# EAGLE board PCB Board Assembly - Eagle (EAGLE 9.6.2)
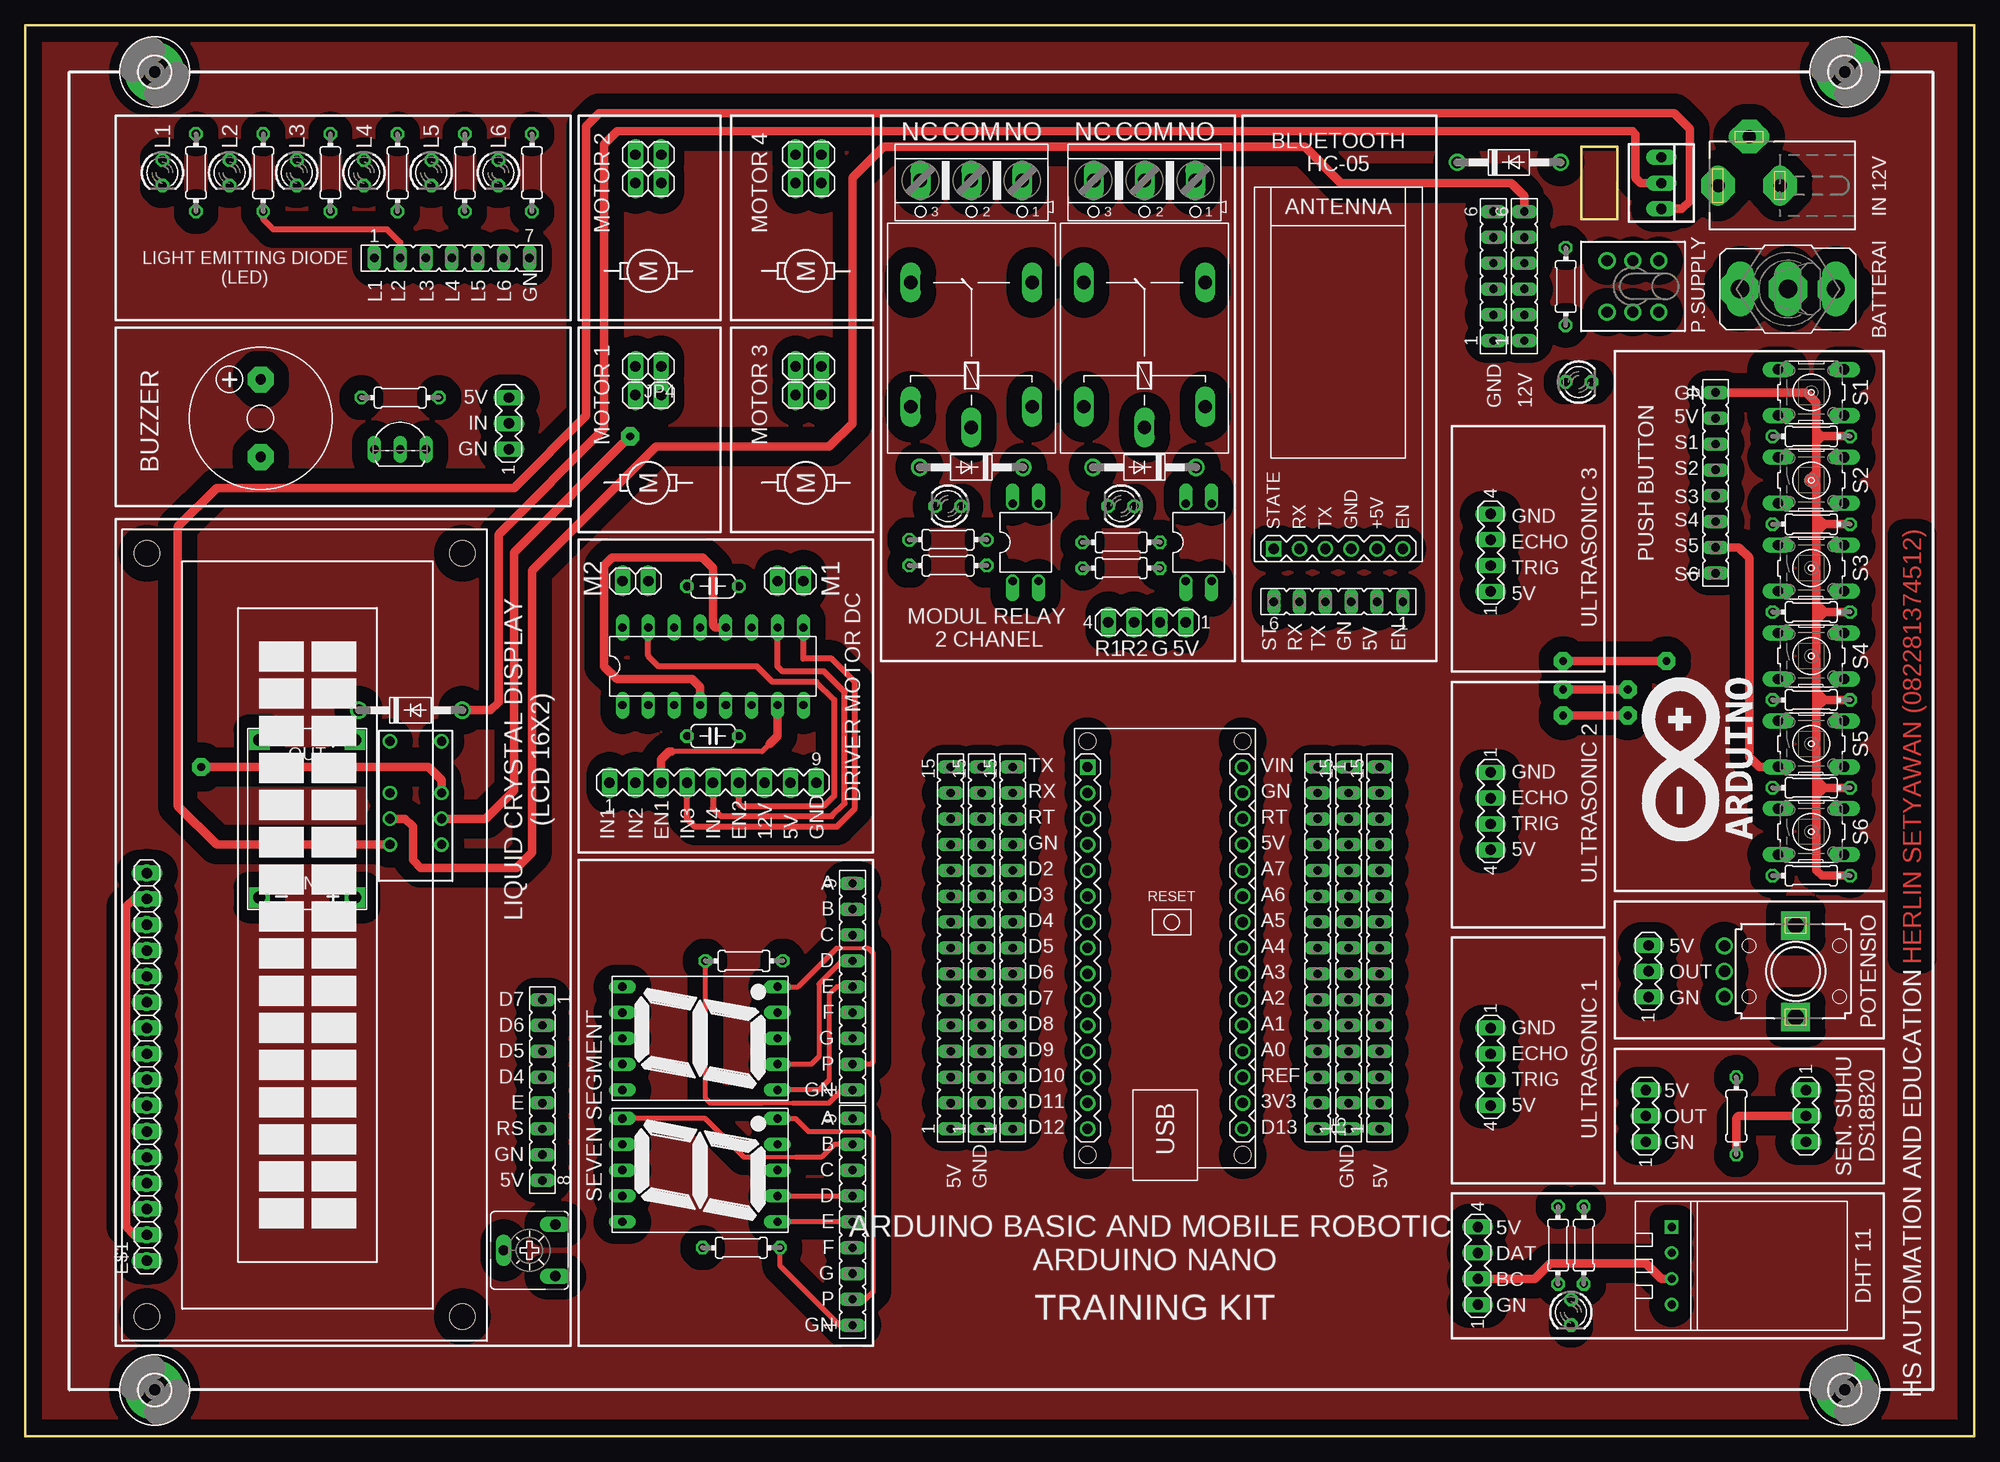
[diagram p0: board, top side]
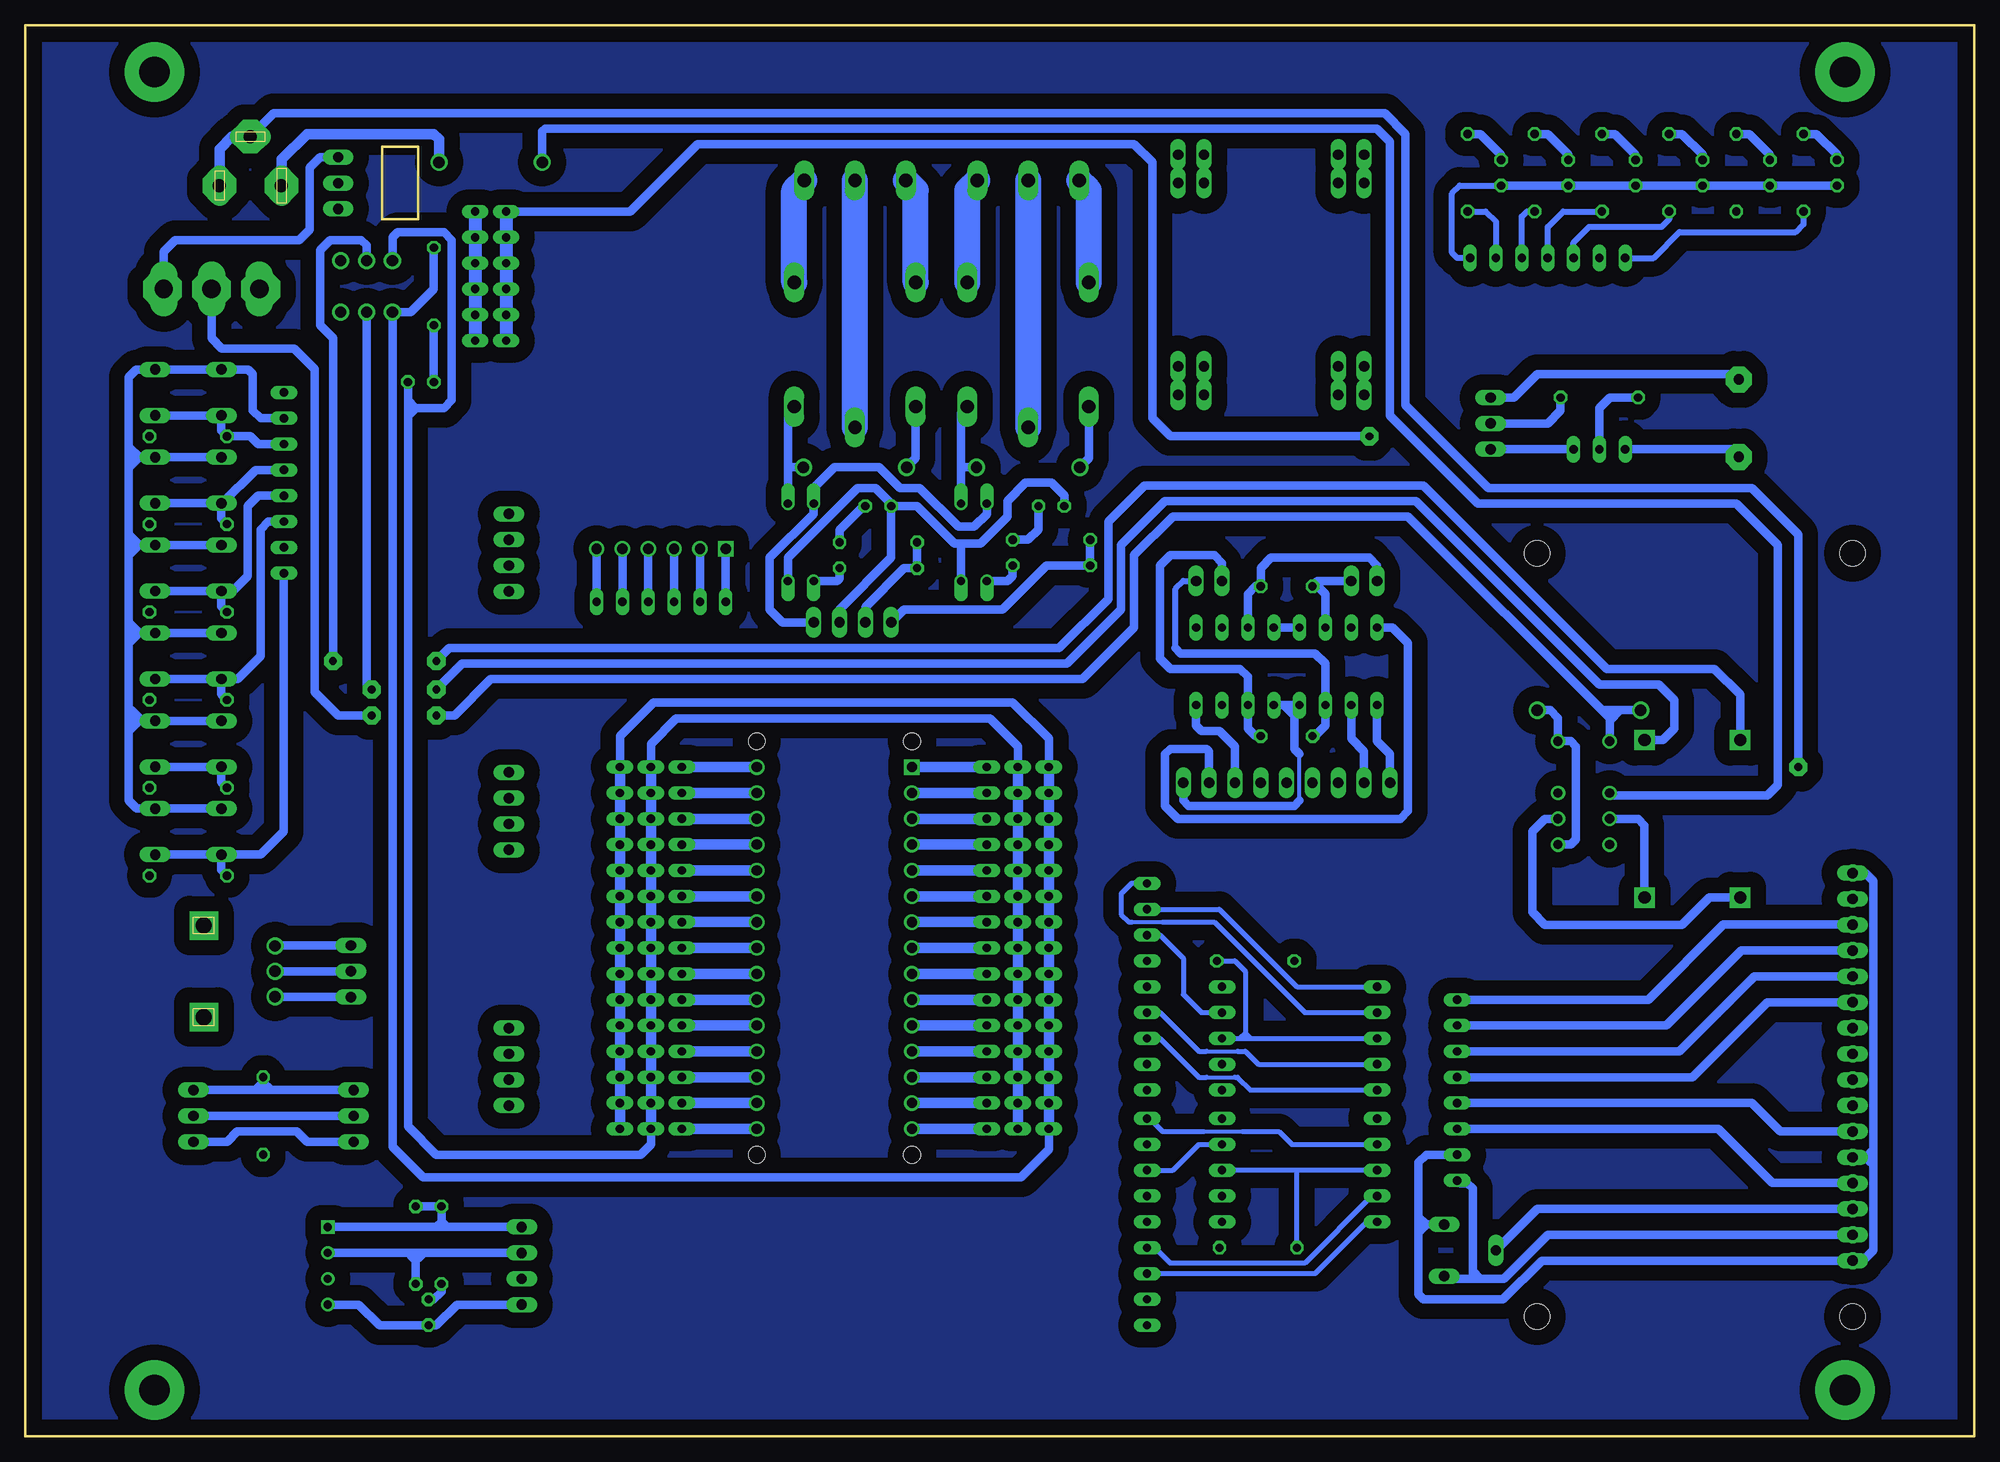
[diagram p1: board, bottom side, seen from below]

Size 191.52 x 138.68 mm. Coordinates in mm from the lower left corner, seen from the top.
Outline: 0,0 191.52,0 191.52,138.68 0,138.68 0,0
Copper layers (1*16): Top 0.035mm / dielectric 1.5mm / Bottom 0.035mm
Design rules "default": minimum track width 6mil, minimum drill 0.35mm, track to track 6mil, track to pad 6mil, pad to pad 6mil, via to via 6mil, smd to smd 6mil, copper to edge 40mil, drill to drill 6mil, minimum pad ring 10mil, minimum via ring 8mil, stop-mask expansion 4mil, vias tented up to drill 0mil, thermal gap 10mil
Milling: 4 lines

## Footprints (pad centres in the part's own frame; a part is rotated, then mirrored left to right if it is on the bottom)
C050-024X044 = drill 0.813 octagon: 1 -2.54,0; 2 2.54,0
DO41-10 = drill 1.118: A 5.08,0; C -5.08,0
7SEG-13 = drill 0.813 long: 1 -5.08,-7.62; 2 -2.54,-7.62; 3 0,-7.62; 4 2.54,-7.62; 5 5.08,-7.62; 6 5.08,7.62; 7 2.54,7.62; 8 0,7.62; 9 -2.54,7.62; 10 -5.08,7.62
TUXGR_16X2_R2 = drill 1 pad 1.676: 1 -32,15.5; 2 -29.46,15.5; 3 -26.92,15.5; 4 -24.38,15.5; 5 -21.84,15.5; 6 -19.3,15.5; 7 -16.76,15.5; 8 -14.22,15.5; 9 -11.68,15.5; 10 -9.14,15.5; 11 -6.6,15.5; 12 -4.06,15.5; 13 -1.52,15.5; 14 1.02,15.5; 15 3.56,15.5; 16 6.1,15.5 | hole 2.5: -37.5,-15.5; 37.5,-15.5; -37.5,15.5; 37.5,15.5
1X16 = drill 1.016 long: 1 -19.05,0; 2 -16.51,0; 3 -13.97,0; 4 -11.43,0; 5 -8.89,0; 6 -6.35,0; 7 -3.81,0; 8 -1.27,0; 9 1.27,0; 10 3.81,0; 11 6.35,0; 12 8.89,0; 13 11.43,0; 14 13.97,0; 15 16.51,0; 16 19.05,0
3,0-PAD = drill 3 pad 5.842: B3,0 0,0
DIL16 = drill 0.813 long: 1 -8.89,-3.81; 2 -6.35,-3.81; 3 -3.81,-3.81; 4 -1.27,-3.81; 5 1.27,-3.81; 6 3.81,-3.81; 7 6.35,-3.81; 8 8.89,-3.81; 9 8.89,3.81; 10 6.35,3.81; 11 3.81,3.81; 12 1.27,3.81; 13 -1.27,3.81; 14 -3.81,3.81; 15 -6.35,3.81; 16 -8.89,3.81
DCJ0303 = drill 1 pad 2 long: 1 0,3.1; 2 4.8,0; 3 0,-3
1X02 = drill 1.016 long: 1 -1.27,0; 2 1.27,0
G5LE = drill 1.321 long: 1 -7.493,-5.969; 2 -7.493,5.969; O 4.699,5.969; P -9.525,0; S 4.699,-5.969
HX = drill 0.9: 1 -6.35,-2.54; 3 -1.27,-2.54; 4 1.27,-2.54; 5 3.81,-2.54; 8 3.81,2.54; 9 1.27,2.54; 10 -1.27,2.54; 12 -6.35,2.54
LED3MM = drill 0.813 octagon: A -1.27,0; K 1.27,0
ARDUINO-NANO-3.0 = drill 1 square: J1.1 17.78,7.62 | drill 1: J1.2 15.24,7.62; J1.3 12.7,7.62; J1.4 10.16,7.62; J1.5 7.62,7.62; J1.6 5.08,7.62; J1.7 2.54,7.62; J1.8 0,7.62; J1.9 -2.54,7.62; J1.10 -5.08,7.62; J1.11 -7.62,7.62; J1.12 -10.16,7.62; J1.13 -12.7,7.62; J1.14 -15.24,7.62; J1.15 -17.78,7.62; J2.1 17.78,-7.62; J2.2 15.24,-7.62; J2.3 12.7,-7.62; J2.4 10.16,-7.62; J2.5 7.62,-7.62; J2.6 5.08,-7.62; J2.7 2.54,-7.62; J2.8 0,-7.62; J2.9 -2.54,-7.62; J2.10 -5.08,-7.62; J2.11 -7.62,-7.62; J2.12 -10.16,-7.62; J2.13 -12.7,-7.62; J2.14 -15.24,-7.62; J2.15 -17.78,-7.62 | hole 1.651: -20.32,7.62; -20.32,-7.62; 20.32,-7.62; 20.32,7.62
DIL04 = drill 0.813 offset: 1 -1.27,-3.81; 2 1.27,-3.81; 3 1.27,3.81; 4 -1.27,3.81
TO92-EBC = drill 0.813 long: B 0,-1.27; C -2.54,-1.27; E 2.54,-1.27
0204/7 = drill 0.813 octagon: 1 -3.81,0; 2 3.81,0
EVUF = drill 1.1 pad 1.676: 1 -2.5,-7; 2 0,-7; 3 2.5,-7 | drill 1.6 pad 2.8 square: M1 4.5,0; M2 -4.5,0
CA6V = drill 1.016 long: A -2.54,-2.54; E 2.54,-2.54; S 0,2.54
B3F-10XX = drill 1.016 long: 1 -3.251,2.261; 2 3.251,2.261; 3 -3.251,-2.261; 4 3.251,-2.261
TL4XPO = drill 1.1 pad 1.676: 1 -2.54,2.54; 2 0,2.54; 3 2.54,2.54; 4 -2.54,-2.54; 5 0,-2.54; 6 2.54,-2.54
M9040P = drill 1.803 long: 1 0,4.699; 2 0,0; 3 0,-4.699
F/CM12P = drill 1.016 pad 2.54 octagon: + 3.81,0; - -3.81,0
FE15 = drill 0.813 long: 1 -17.78,0; 2 -15.24,0; 3 -12.7,0; 4 -10.16,0; 5 -7.62,0; 6 -5.08,0; 7 -2.54,0; 8 0,0; 9 2.54,0; 10 5.08,0; 11 7.62,0; 12 10.16,0; 13 12.7,0; 14 15.24,0; 15 17.78,0
MA04-1 = drill 1.016 long: 1 -3.81,0; 2 -1.27,0; 3 1.27,0; 4 3.81,0
FE08 = drill 0.813 long: 1 -8.89,0; 2 -6.35,0; 3 -3.81,0; 4 -1.27,0; 5 1.27,0; 6 3.81,0; 7 6.35,0; 8 8.89,0
MA09-1 = drill 1.016 long: 1 -10.16,0; 2 -7.62,0; 3 -5.08,0; 4 -2.54,0; 5 0,0; 6 2.54,0; 7 5.08,0; 8 7.62,0; 9 10.16,0
FE07 = drill 0.813 long: 1 -7.62,0; 2 -5.08,0; 3 -2.54,0; 4 0,0; 5 2.54,0; 6 5.08,0; 7 7.62,0
MA03-1 = drill 1.016 long: 1 -2.54,0; 2 0,0; 3 2.54,0
FE09 = drill 0.813 long: 1 -10.16,0; 2 -7.62,0; 3 -5.08,0; 4 -2.54,0; 5 0,0; 6 2.54,0; 7 5.08,0; 8 7.62,0; 9 10.16,0
FE06 = drill 0.813 long: 1 -6.35,0; 2 -3.81,0; 3 -1.27,0; 4 1.27,0; 5 3.81,0; 6 6.35,0
TEMP-HUM-SENSOR-DHT11 = drill 0.8 square: 1 -3.81,0 | drill 0.8: 2 -1.27,0; 3 1.27,0; 4 3.81,0
WIRELESS-BLUETOOTH-HC-05 = drill 1 square: 1 -6.35,-17.145 | drill 1: 2 -3.81,-17.145; 3 -1.27,-17.145; 4 1.27,-17.145; 5 3.81,-17.145; 6 6.35,-17.145
DC-DC-STEP-DOWN-MP2307 = drill 1.2 pad 2 square: IN+ -7.747,-4.699; IN- -7.747,4.699; OUT+ 7.747,-4.699; OUT- 7.747,4.699
AK500/3 = drill 1.321 long: 1 -5.004,0; 2 0,0; 3 5.004,0
22-23-2031 = drill 1 long: 1 -2.54,0; 2 0,0; 3 2.54,0

## Placement (x,y rotation side)
C1  100n  [C050-024X044]  67.56,68.83 0 top
C2  100n  [C050-024X044]  67.56,83.57 0 top
D1  1N4004  [DO41-10]  92.96,95.25 180 top
D2  1N4004  [DO41-10]  109.98,95.25 180 top
D3  [7SEG-13]  66.29,26.16 90 top
D4  [7SEG-13]  66.29,39.12 90 top
D5  1N4004  [DO41-10]  145.8,125.22 0 top
D6  1N4004  [DO41-10]  37.85,71.37 0 top
DIS1  TUXGR_16X2_R2  [TUXGR_16X2_R2]  27.43,49.28 90 top
E$1  [1X16]  11.94,36.32 90 top
H1  MOUNT-PAD-ROUND3.0  [3,0-PAD]  178.82,4.57 90 top
H2  MOUNT-PAD-ROUND3.0  [3,0-PAD]  178.82,134.11 90 top
H3  MOUNT-PAD-ROUND3.0  [3,0-PAD]  12.7,134.11 90 top
H4  MOUNT-PAD-ROUND3.0  [3,0-PAD]  12.7,4.57 90 top
IC1  L293D  [DIL16]  67.56,75.69 0 top
J1  [DCJ0303]  169.42,122.94 90 top
JP1  [1X02]  59.94,84.07 180 top
JP2  [1X02]  75.18,84.07 0 top
JP3  [1X02]  61.21,102.36 180 top
JP4  [1X02]  61.21,105.16 180 top
JP5  [1X02]  76.96,102.36 180 top
JP6  [1X02]  76.96,105.16 180 top
JP7  [1X02]  61.21,123.19 180 top
JP8  [1X02]  61.21,125.98 180 top
JP9  [1X02]  76.96,123.19 180 top
JP10  [1X02]  76.96,125.98 180 top
K1  G5L  [G5LE]  92.96,108.71 90 top
K2  G5L  [G5LE]  109.98,108.71 90 top
K3  HX2-5V  [HX]  38.35,61.98 270 top
LED1  [LED3MM]  90.68,91.44 180 top
LED2  [LED3MM]  107.7,91.44 180 top
LED3  [LED3MM]  46.48,124.21 270 top
LED4  [LED3MM]  39.88,124.21 270 top
LED5  [LED3MM]  33.27,124.21 270 top
LED6  [LED3MM]  26.67,124.21 270 top
LED7  [LED3MM]  20.07,124.21 270 top
LED8  [LED3MM]  13.46,124.21 270 top
LED9  [LED3MM]  151.89,12.19 270 top
LED10  [LED3MM]  152.65,103.63 0 top
M1  ARDUINO-NANO-3.0  [ARDUINO-NANO-3.0]  112.01,48.01 90 top
OK1  PC817  [DIL04]  98.3,87.88 0 top
OK2  PC817  [DIL04]  115.32,87.88 0 top
Q1  BC548  [TO92-EBC]  36.83,98.3 0 top
R1  180  [0204/7]  90.68,85.6 0 top
R2  180  [0204/7]  107.7,85.34 0 top
R3  180  [0204/7]  90.68,88.14 0 top
R4  180  [0204/7]  107.7,87.88 0 top
R5  10k  [0204/7]  175.51,98.3 0 top
R6  10k  [0204/7]  175.51,89.66 0 top
R7  10k  [0204/7]  175.51,81.03 0 top
R8  10k  [0204/7]  175.51,72.39 0 top
R9  10k  [0204/7]  175.51,63.75 0 top
R10  10k  [0204/7]  175.51,55.12 0 top
R11  180  [0204/7]  49.78,124.21 90 top
R12  180  [0204/7]  43.18,124.21 90 top
R13  180  [0204/7]  36.58,124.21 90 top
R14  180  [0204/7]  29.97,124.21 90 top
R15  180  [0204/7]  23.37,124.21 90 top
R16  180  [0204/7]  16.76,124.21 90 top
R17  180  [0204/7]  36.83,102.11 180 top
R18  EVUF2A  [EVUF]  173.99,45.72 270 top
R19  10k  [0204/7]  153.16,18.8 270 top
R20  180  [0204/7]  150.62,18.8 90 top
R21  4k7  [0204/7]  168.15,31.5 270 top
R22  [CA6V]  49.53,18.29 90 top
R23  180  [0204/7]  70.36,18.54 180 top
R24  180  [0204/7]  70.61,46.74 0 top
R25  180  [0204/7]  151.38,113.03 90 top
S1  [B3F-10XX]  175.51,102.62 0 top
S2  TL42PO  [TL4XPO]  157.99,113.03 180 top
S3  [B3F-10XX]  175.51,93.98 0 top
S4  [M9040P]  173.23,112.78 90 top
S5  [B3F-10XX]  175.51,85.34 0 top
S6  [B3F-10XX]  175.51,76.71 0 top
S7  [B3F-10XX]  175.51,68.07 0 top
S8  [B3F-10XX]  175.51,59.44 0 top
SG1  F/CM12P  [F/CM12P]  23.11,100.08 90 top
SV1  [FE15]  97.03,48.01 90 top
SV2  [FE15]  127,48.01 270 top
SV3  [MA04-1]  110.24,80.01 180 top
SV4  [FE08]  166.12,93.73 90 top
SV5  [MA09-1]  67.56,64.26 0 top
SV6  [FE07]  41.91,115.82 0 top
SV7  [FE15]  90.93,48.01 90 top
SV8  [FE15]  93.98,48.01 90 top
SV9  [FE15]  130.05,48.01 90 top
SV10  [FE15]  133.1,48.01 90 top
SV11  [MA03-1]  47.5,99.57 90 top
SV12  [MA03-1]  159.51,45.72 90 top
SV13  [MA04-1]  142.75,16.76 90 top
SV14  [MA03-1]  175.01,31.5 270 top
SV15  [MA03-1]  159.26,31.5 90 top
SV16  [FE08]  50.8,34.04 270 top
SV17  [FE09]  81.28,21.08 90 top
SV18  [FE09]  81.28,44.2 90 top
SV19  [FE06]  144.27,114.05 90 top
SV20  [FE06]  147.32,114.05 90 top
SV21  [FE06]  129.03,82.04 180 top
SV22  [MA04-1]  144.02,36.32 270 top
SV23  [MA04-1]  144.02,61.47 270 top
SV24  [MA04-1]  144.02,86.87 90 top
U$1  TEMP-HUM-SENSOR-DHT11  [TEMP-HUM-SENSOR-DHT11]  161.8,16.76 270 top
U$2  WIRELESS-BLUETOOTH-HC-05  [WIRELESS-BLUETOOTH-HC-05]  129.03,104.39 0 top
U$3  DC-DC-STEP-DOWN-MP2307  [DC-DC-STEP-DOWN-MP2307]  27.69,60.71 90 top
X1  [AK500/3]  92.96,123.44 180 top
X2  [AK500/3]  109.98,123.44 180 top
X3  22-23-2031  [22-23-2031]  160.78,123.19 270 top

## Library data of the parts
C1 C2 = rcl; SPICEPREFIX: C
D1 D2 D5 D6 = diode
D3 D4 = special
DIS1 = display-lcd; OC_FARNELL: unknown; OC_NEWARK: unknown
E$1 JP1-JP10 = pinhead
H1-H4 = holes
IC1 = st-microelectronics; MPN: L293D; OC_FARNELL: 9589619; OC_NEWARK: 56P8249
J1 = con-jack; OC_FARNELL: unknown; OC_NEWARK: unknown
K1-K3 = relay; OC_FARNELL: unknown; OC_NEWARK: unknown
LED1-LED10 = led
M1 U$1-U$3 = Arduino dan Step Down
OK1 OK2 = optocoupler; MPN: PC817X4J000F; OC_FARNELL: 9707727; OC_NEWARK: 97K7059
Q1 = transistor-npn
R1-R17 R19-R21 R23-R25 = rcl; SPICEPREFIX: R
R18 R22 = pot
S1 S3 S5-S8 = switch-omron; MPN: B3F-1000; OC_FARNELL: 176432; OC_NEWARK: 36M3542
S2 S4 = switch
SG1 = buzzer; OC_FARNELL: unknown; OC_NEWARK: unknown
SV1 SV2 SV4 SV6-SV10 SV16-SV21 = con-lsta; OC_FARNELL: unknown; OC_NEWARK: unknown
SV3 SV5 SV11-SV15 SV22-SV24 = con-lstb; OC_FARNELL: unknown; OC_NEWARK: unknown
X1 X2 = con-ptr500; OC_FARNELL: unknown; OC_NEWARK: unknown
X3 = con-molex; MF: MOLEX; MPN: 22-23-2031; OC_FARNELL: 1462950; OC_NEWARK: 30C0862

## Nets
5V: R25.2 S2.3 SV7.1 SV7.2 SV7.3 SV7.4 SV7.5 SV7.6 SV7.7 SV7.8 SV7.9 SV7.10 SV7.11 SV7.12 SV7.13 SV7.14 SV7.15 SV10.1 SV10.2 SV10.3 SV10.4 SV10.5 SV10.6 SV10.7 SV10.8 SV10.9 SV10.10 SV10.11 SV10.12 SV10.13 SV10.14 SV10.15
5VD: IC1.16 SV5.8
5VR: OK1.4 OK2.4 SV3.1
12VD: IC1.8 SV5.7
GND: LED10.K S2.6 SV8.1 SV8.2 SV8.3 SV8.4 SV8.5 SV8.6 SV8.7 SV8.8 SV8.9 SV8.10 SV8.11 SV8.12 SV8.13 SV8.14 SV8.15 SV9.1 SV9.2 SV9.3 SV9.4 SV9.5 SV9.6 SV9.7 SV9.8 SV9.9 SV9.10 SV9.11 SV9.12 SV9.13 SV9.14 SV9.15
GNDD: IC1.4 IC1.5 IC1.12 IC1.13 SV5.9
GNDR: LED1.K LED2.K OK1.2 OK2.2 SV3.2
N$1: M1.J2.15 SV2.15
N$2: M1.J2.14 SV2.14
N$3: M1.J2.13 SV2.13
N$4: M1.J2.12 SV2.12
N$5: M1.J2.11 SV2.11
N$6: M1.J2.10 SV2.10
N$7: M1.J2.9 SV2.9
N$8: M1.J2.8 SV2.8
N$9: M1.J2.7 SV2.7
N$10: M1.J2.6 SV2.6
N$11: M1.J2.5 SV2.5
N$12: M1.J2.4 SV2.4
N$13: M1.J2.3 SV2.3
N$14: M1.J2.2 SV2.2
N$15: M1.J2.1 SV2.1
N$16: M1.J1.1 SV1.15
N$17: M1.J1.2 SV1.14
N$18: M1.J1.3 SV1.13
N$19: M1.J1.4 SV1.12
N$20: M1.J1.5 SV1.11
N$21: M1.J1.6 SV1.10
N$22: M1.J1.7 SV1.9
N$23: M1.J1.8 SV1.8
N$24: M1.J1.9 SV1.7
N$25: M1.J1.10 SV1.6
N$26: M1.J1.11 SV1.5
N$27: M1.J1.12 SV1.4
N$28: M1.J1.13 SV1.3
N$29: M1.J1.14 SV1.2
N$30: M1.J1.15 SV1.1
N$31: OK1.1 R1.2
N$32: D1.C K1.1 OK1.3
N$33: D1.A K1.2
N$34: K1.S X1.1
N$35: K1.P X1.2
N$36: K1.O X1.3
N$37: OK2.1 R2.2
N$38: D2.C K2.1 OK2.3
N$39: D2.A K2.2
N$40: K2.S X2.1
N$41: K2.P X2.2
N$42: K2.O X2.3
N$43: R2.1 R4.1 SV3.3
N$44: R1.1 R3.1 SV3.4
N$45: LED1.A R3.2
N$46: LED2.A R4.2
N$47: C1.1 IC1.3 JP2.2
N$48: C1.2 IC1.6 JP2.1
N$49: C2.1 IC1.14 JP1.1
N$50: C2.2 IC1.11 JP1.2
N$51: IC1.1 SV5.1
N$52: IC1.2 SV5.2
N$53: IC1.7 SV5.3
N$54: IC1.9 SV5.4
N$55: IC1.10 SV5.5
N$56: IC1.15 SV5.6
N$57: R5.1 S1.3 S1.4 SV4.6
N$58: R6.1 S3.3 S3.4 SV4.5
N$59: R7.1 S5.3 S5.4 SV4.4
N$60: R8.1 S6.3 S6.4 SV4.3
N$61: R9.1 S7.3 S7.4 SV4.2
N$62: R10.1 S8.3 S8.4 SV4.1
N$63: S1.1 S1.2 S3.1 S3.2 S5.1 S5.2 S6.1 S6.2 S7.1 S7.2 S8.1 S8.2 SV4.7
N$64: R5.2 R6.2 R7.2 R8.2 R9.2 R10.2 SV4.8
N$65: LED3.A R11.2
N$66: LED4.A R12.2
N$67: LED5.A R13.2
N$68: LED6.A R14.2
N$69: LED7.A R15.2
N$70: LED8.A R16.2
N$71: LED3.K LED4.K LED5.K LED6.K LED7.K LED8.K SV6.7
N$72: R11.1 SV6.6
N$73: R12.1 SV6.5
N$74: R13.1 SV6.4
N$75: R14.1 SV6.3
N$76: R15.1 SV6.2
N$77: R16.1 SV6.1
N$80: SG1.+ SV11.3
N$83: Q1.E SV11.1
N$84: Q1.C SG1.-
N$85: Q1.B R17.2
N$86: R17.1 SV11.2
N$87: R18.2 SV12.2
N$88: R18.1 SV12.3
N$89: R18.3 SV12.1
N$90: R19.1 R20.2 SV13.4 U$1.1
N$91: R19.2 SV13.3 U$1.2
N$92: SV13.2 U$1.3
N$93: SV14.3 SV15.1
N$94: LED9.K SV13.1 U$1.4
N$95: R21.2 SV14.2 SV15.2
N$96: LED9.A R20.1
N$97: R21.1 SV14.1 SV15.3
N$98: DIS1.1 DIS1.5 DIS1.16 R22.E SV16.7
N$99: DIS1.2 DIS1.15 R22.A SV16.8
N$100: DIS1.3 R22.S
N$101: DIS1.14 SV16.1
N$102: DIS1.13 SV16.2
N$103: DIS1.12 SV16.3
N$104: DIS1.11 SV16.4
N$105: DIS1.6 SV16.5
N$106: DIS1.4 SV16.6
N$107: R23.1 SV17.1
N$108: D3.3 D3.8 R23.2
N$109: D3.7 SV17.9
N$110: D3.6 SV17.8
N$111: D3.4 SV17.7
N$112: D3.2 SV17.6
N$113: D3.1 SV17.5
N$114: D3.9 SV17.4
N$115: D3.10 SV17.3
N$116: D3.5 SV17.2
N$117: R24.1 SV18.1
N$118: D4.3 D4.8 R24.2
N$119: D4.7 SV18.9
N$120: D4.6 SV18.8
N$121: D4.4 SV18.7
N$122: D4.2 SV18.6
N$123: D4.1 SV18.5
N$124: D4.9 SV18.4
N$125: D4.10 SV18.3
N$126: D4.5 SV18.2
N$127: S2.2 U$3.OUT+
N$128: S2.5 U$3.OUT-
N$131: LED10.A R25.1
N$132: SV21.1 U$2.6
N$133: SV21.2 U$2.5
N$134: D6.C K3.1 S4.2
N$135: D5.A J1.1
N$136: J1.2 J1.3 K3.10
N$137: D5.C K3.3
N$138: K3.5 X3.3
N$139: D6.A K3.8 K3.12 X3.2
N$140: S4.3 X3.1
N$146: K3.9 SV19.1 SV19.2 SV19.3 SV19.4 SV19.5 SV19.6 U$3.IN-
N$147: K3.4 SV20.1 SV20.2 SV20.3 SV20.4 SV20.5 SV20.6 U$3.IN+
N$148: SV21.3 U$2.4
N$149: SV21.4 U$2.3
N$150: SV21.5 U$2.2
N$151: SV21.6 U$2.1

## Tracks (layer width: path | path; a pad name or v marks a point on that pad's centre or on a via)
5V
  Bottom 0.813: R25.2 151.38,112.78 153.67,110.49 S2.3 155.45,28.45 152.44,25.44 93.69,25.44 90.93,28.19 SV7.1 | SV7.15 90.93,68.58 94.49,72.14 129.79,72.14 133.1,68.83 SV10.15
  Bottom 1.016: SV7.15 SV7.14 SV7.13 SV7.12 SV7.11 SV7.10 SV7.9 SV7.8 SV7.7 SV7.6 SV7.5 SV7.4 SV7.3 SV7.2 SV7.1 | SV10.15 SV10.14 SV10.13 SV10.12 SV10.11 SV10.10 SV10.9 SV10.8 SV10.7 SV10.6 SV10.5 SV10.4 SV10.3 SV10.2 SV10.1
5VD
  Bottom 0.813: SV5.8 75.18,67.31 75.44,67.56 78.99,67.56 79.5,67.06 79.5,61.98 78.23,60.71 56.39,60.71 55.63,61.47 55.63,77.98 57.15,79.5 IC1.16
5VR
  Bottom 0.813: OK1.4 97.03,90.68 98.3,89.41 99.82,89.41 103.63,93.22 105.57,93.22 107.6,95.25 112.01,95.25 114.05,93.22 OK2.4 114.05,90.68 118.36,86.36 118.36,81.28 117.09,80.01 SV3.1
12VD
  Bottom 0.813: SV5.7 72.64,67.82 74.17,69.34 75.95,69.34 76.45,69.85 IC1.8
GND
  Bottom 0.813: SV9.15 130.05,68.07 127.55,70.57 96.74,70.57 93.98,67.82 SV8.15 | LED10.K 153.92,101.85 | 153.92,101.85 153.92,101.09 | 153.92,101.09 153.92,100.33 | 153.92,100.33 153.92,30.48 151.13,27.69 131.06,27.69 130.05,28.7 SV9.1 | S2.6 155.45,117.86 154.94,118.36 150.37,118.36 149.61,117.6 149.61,101.85 150.37,101.09 153.16,101.09 | 153.92,101.09 153.16,101.09 | 153.92,101.85 153.16,101.09 | 153.16,101.09 153.92,100.33
  Bottom 1.016: SV8.15 SV8.14 SV8.13 SV8.12 SV8.11 SV8.10 SV8.9 SV8.8 SV8.7 SV8.6 SV8.5 SV8.4 SV8.3 SV8.2 SV8.1 | SV9.1 SV9.2 SV9.3 SV9.4 SV9.5 SV9.6 SV9.7 SV9.8 SV9.9 SV9.10 SV9.11 SV9.12 SV9.13 SV9.14 SV9.15
GNDD
  Top 0.813: IC1.12 67.82,79.5 67.56,79.76 67.56,85.34 66.55,86.36 57.66,86.36 56.9,85.6 56.9,75.69 58.17,74.42 65.53,74.42 66.29,73.66 IC1.4
  Bottom 0.406: 66.29,62.48 66.29,67.06
  Bottom 0.813: 66.8,71.88 IC1.4 66.29,71.37 66.8,70.87 | 66.8,71.88 67.82,71.88 | 67.82,71.88 IC1.5 | IC1.13 IC1.12 | SV5.9 77.72,62.48 77.22,61.98 66.8,61.98 66.29,62.48 | 66.29,67.06 66.8,67.56 66.8,70.87 | 66.8,70.87 66.8,71.88 | 66.8,70.87 67.82,71.88
GNDR
  Bottom 0.813: LED2.K 103.89,91.44 100.2,87.76 99.69,87.76 | OK1.2 99.57,87.63 99.69,87.76 | LED1.K 89.41,92.46 90.68,93.73 93.22,93.73 95,91.95 95,90.42 97.66,87.76 99.69,87.76 | SV3.2 111.51,81.28 106.43,86.36 LED2.K | OK2.2 116.59,86.36 109.73,93.22 107.95,93.22 106.43,91.69 LED2.K
N$1
  Bottom 1.016: M1.J2.15 SV2.15
N$2
  Bottom 1.016: M1.J2.14 SV2.14
N$3
  Bottom 1.016: M1.J2.13 SV2.13
N$4
  Bottom 1.016: M1.J2.12 SV2.12
N$5
  Bottom 1.016: M1.J2.11 SV2.11
N$6
  Bottom 1.016: M1.J2.10 SV2.10
N$7
  Bottom 1.016: SV2.9 M1.J2.9
N$8
  Bottom 1.016: SV2.8 M1.J2.8
N$9
  Bottom 1.016: SV2.7 M1.J2.7
N$10
  Bottom 1.016: SV2.6 M1.J2.6
N$11
  Bottom 1.016: SV2.5 M1.J2.5
N$12
  Bottom 1.016: SV2.4 M1.J2.4
N$13
  Bottom 1.016: SV2.3 M1.J2.3
N$14
  Bottom 1.016: SV2.2 M1.J2.2
N$15
  Bottom 1.016: SV2.1 M1.J2.1
N$16
  Bottom 1.016: M1.J1.1 SV1.15
N$17
  Bottom 1.016: M1.J1.2 SV1.14
N$18
  Bottom 1.016: M1.J1.3 SV1.13
N$19
  Bottom 1.016: M1.J1.4 SV1.12
N$20
  Bottom 1.016: M1.J1.5 SV1.11
N$21
  Bottom 1.016: M1.J1.6 SV1.10
N$22
  Bottom 1.016: M1.J1.7 SV1.9
N$23
  Bottom 1.016: M1.J1.8 SV1.8
N$24
  Bottom 1.016: M1.J1.9 SV1.7
N$25
  Bottom 1.016: M1.J1.10 SV1.6
N$26
  Bottom 1.016: M1.J1.11 SV1.5
N$27
  Bottom 1.016: M1.J1.12 SV1.4
N$28
  Bottom 1.016: M1.J1.13 SV1.3
N$29
  Bottom 1.016: M1.J1.14 SV1.2
N$30
  Bottom 1.016: M1.J1.15 SV1.1
N$31
  Bottom 0.813: R1.2 94.49,84.58 95,84.07 OK1.1
N$32
  Bottom 0.813: OK1.3 99.57,95.25 | 99.57,95.25 99.57,100.58 K1.1 | D1.C 99.57,95.25
N$33
  Bottom 0.813: K1.2 87,96.14 D1.A
N$34
  Bottom 2.54: K1.S 98.93,122.48 X1.1
N$35
  Bottom 2.54: X1.2 K1.P
N$36
  Bottom 2.54: K1.O 87,122.48 X1.3
N$37
  Bottom 0.813: OK2.1 111.76,84.07 111.51,84.33 R2.2
N$38
  Bottom 0.813: OK2.3 116.59,95.25 | 116.59,95.25 116.59,100.58 K2.1 | D2.C 116.59,95.25
N$39
  Bottom 0.813: K2.2 104.01,96.14 D2.A
N$40
  Bottom 2.54: K2.S 115.95,122.48 X2.1
N$41
  Bottom 2.54: K2.P X2.2
N$42
  Bottom 2.54: K2.O 104.01,122.48 X2.3
N$43
  Bottom 0.813: R4.1 R2.1 105.16,85.34 108.97,81.53 SV3.3
N$44
  Bottom 0.813: R3.1 R1.1 91.19,85.6 95.5,81.28 105.16,81.28 SV3.4
N$45
  Bottom 0.813: LED1.A 91.95,89.15 92.96,88.14 R3.2
N$46
  Bottom 0.813: LED2.A 109.12,91.44 111.51,89.06 R4.2
N$47
  Bottom 0.61: 78.49,77.47 78.49,83.31 77.72,84.07 JP2.2
  Bottom 0.813: C1.1 64.77,68.83 63.75,69.85 IC1.3 63.75,75.95 64.77,76.96 77.98,76.96 78.49,77.47
N$48
  Bottom 0.813: C1.2 70.61,68.83 71.37,69.6 IC1.6 71.37,74.68 72.14,75.44 78.99,75.44 80.01,76.45 80.01,85.6 78.99,86.61 74.68,86.61 73.91,85.85 JP2.1
N$49
  Bottom 0.813: IC1.14 63.75,82.8 64.52,83.57 C2.1 64.52,84.07 JP1.1
N$50
  Bottom 0.813: IC1.11 71.37,82.8 70.61,83.57 C2.2 70.1,85.34 69.09,86.36 59.44,86.36 58.67,85.6 JP1.2
N$51
  Bottom 0.813: SV5.1 57.4,67.06 58.67,68.33 IC1.1
N$52
  Bottom 0.813: SV5.2 59.94,67.31 61.21,68.58 IC1.2
N$53
  Top 0.508: 73.15,68.07 72.39,67.31 63.5,67.31
  Top 0.813: IC1.7 73.91,68.83 73.15,68.07 | 63.5,67.31 63.25,67.31 62.48,66.55 SV5.3
N$54
  Top 0.61: SV5.4 65.02,60.71 65.79,59.94 79.76,59.94 81.53,61.72 81.53,74.17 79.25,76.45 76.45,76.45 IC1.9
N$55
  Top 0.61: SV5.5 67.56,61.72 68.33,60.96 79.25,60.96 80.52,62.23 80.52,73.15 78.49,75.18 74.42,75.18 73.91,75.69 IC1.10
N$56
  Top 0.61: SV5.6 70.1,62.23 70.36,61.98 78.49,61.98 79.5,62.99 79.5,72.39 77.72,74.17 73.41,74.17 71.88,75.69 62.23,75.69 61.21,76.71 IC1.15
N$57
  Bottom 0.813: S1.4 S1.3 172.26,98.86 R5.1 169.42,98.3 168.66,97.54 SV4.6
N$58
  Bottom 0.813: R6.1 172.26,90.22 S3.3 | S3.3 S3.4 | SV4.5 168.91,95 172.19,91.72 S3.3
N$59
  Bottom 0.813: R7.1 172.26,81.59 S5.3 | S5.3 S5.4 | SV4.4 168.66,92.46 169.67,91.44 169.67,84.58 171.17,83.08 S5.3
N$60
  Bottom 0.813: R8.1 172.26,72.95 S6.3 | S6.3 S6.4 | SV4.3 167.64,89.92 168.4,89.15 168.4,76.71 170.66,74.45 S6.3
N$61
  Top 0.813: SV4.2 168.4,87.38 169.42,86.36 169.42,66.8 170.41,65.81 S7.3
  Bottom 0.813: S7.4 S7.3 172.26,64.31 R9.1
N$62
  Bottom 0.813: S8.3 S8.4 | R10.1 172.26,55.68 S8.3 | SV4.1 166.12,59.44 168.38,57.18 S8.3
N$63
  Bottom 0.813: S8.1 S8.2 180.57,61.7 181.36,62.48 181.36,69.34 | S7.1 S7.2 | S6.1 S6.2 | S5.1 S5.2 | S3.1 S3.2 180.34,96.24 | 181.36,69.34 181.36,70.36 | 181.36,70.36 181.36,71.37 | 181.36,71.37 181.36,77.98 | 181.36,77.98 181.36,78.74 | 181.36,78.74 181.36,80.01 | 181.36,80.01 181.36,86.61 | 181.36,86.61 181.36,87.63 | 181.36,87.63 181.36,88.65 | 181.36,88.65 181.36,95.25 | 181.36,95.73 181.36,96.27 | 181.36,96.27 181.36,97.26 | 181.36,97.26 181.36,104.14 180.62,104.88 S1.2 S1.1 169.65,104.88 169.16,104.39 169.16,100.84 168.4,100.08 SV4.7 | S7.2 178.79,70.36 181.36,70.36 | S6.2 181.13,78.97 181.36,78.74 | S5.2 181.33,87.61 181.36,87.63 | 180.34,96.24 180.85,96.24 | 180.85,96.24 181.33,96.24 181.36,96.27 | 180.85,96.24 181.36,95.73 | 181.36,95.73 181.36,95.25 | 180.34,96.24 181.33,95.25 181.36,95.25 | 180.34,96.24 181.36,97.26 | S5.2 180.37,87.61 181.36,86.61 | S5.2 180.31,87.61 181.36,88.65 | S6.2 180.37,78.97 181.36,77.98 | S6.2 180.31,78.97 181.36,80.01 | S7.2 180.37,70.33 181.36,69.34 | S7.2 180.06,70.33 181.1,71.37 181.36,71.37
N$64
  Top 0.813: R10.2 176.53,55.12 176.02,55.63 176.02,62.99 | 176.02,97.79 176.53,98.3 | R5.2 176.53,98.3 | 176.02,62.99 176.02,63.5 | 176.02,63.5 176.02,64.52 | 176.02,64.52 176.02,71.63 | 176.02,71.63 176.02,72.39 | 176.02,72.39 176.02,73.15 | 176.02,73.15 176.02,80.26 | 176.02,80.26 176.02,81.03 | 176.02,81.03 176.02,81.79 | 176.02,81.79 176.02,88.9 | 176.02,88.9 176.02,89.41 | 176.02,89.41 176.02,90.17 | 176.02,90.17 176.02,93.22 | 176.02,93.22 176.02,93.98 | 176.02,93.98 176.02,94.74 | 176.02,94.74 176.02,97.79 | R6.2 176.78,89.66 | 176.78,89.66 176.28,89.66 176.02,89.41 | R7.2 176.78,81.03 | 176.02,81.03 176.78,81.03 | R8.2 176.78,72.39 | 176.78,72.39 176.02,72.39 | R9.2 176.78,63.75 | 176.78,63.75 176.28,63.75 176.02,63.5 | 176.78,63.75 176.02,62.99 | 176.78,63.75 176.02,64.52 | 176.78,72.39 176.02,71.63 | 176.78,72.39 176.02,73.15 | 176.78,81.03 176.02,80.26 | 176.78,81.03 176.02,81.79 | 176.78,89.66 176.02,88.9 | 176.78,89.66 176.28,90.17 176.02,90.17 | 176.02,93.98 175.26,93.98 | 175.26,93.98 176.02,93.22 | 175.26,93.98 176.02,94.74 | SV4.8 175.01,102.62 176.02,101.6 176.02,98.81 | 176.02,98.81 176.02,97.79 | 176.53,98.3 176.02,98.81
N$65
  Bottom 0.813: R11.2 48.51,128.02 46.48,125.98 LED3.A
N$66
  Bottom 0.813: R12.2 41.91,128.02 39.88,125.98 LED4.A
N$67
  Bottom 0.813: R13.2 35.31,128.02 33.27,125.98 LED5.A
N$68
  Bottom 0.813: R14.2 28.7,128.02 26.67,125.98 LED6.A
N$69
  Bottom 0.813: R15.2 22.1,128.02 20.07,125.98 LED7.A
N$70
  Bottom 0.813: R16.2 15.49,128.02 13.46,125.98 LED8.A
N$71
  Bottom 0.61: SV6.7 50.8,115.82 51.31,116.33 51.31,122.17 50.55,122.94 LED3.K
  Bottom 0.813: LED8.K LED7.K LED6.K LED5.K LED4.K LED3.K
N$72
  Bottom 0.61: R11.1 48.01,120.4 46.99,119.38 SV6.6
N$73
  Bottom 0.61: SV6.5 44.45,119.89 43.94,120.4 R12.1
N$74
  Bottom 0.61: SV6.4 41.91,118.87 40.39,120.4 R13.1
N$75
  Bottom 0.61: SV6.3 39.37,117.35 37.85,118.87 30.73,118.87 29.97,119.63 R14.1
N$76
  Top 0.61: SV6.2 36.83,117.35 35.56,118.62 24.38,118.62 23.37,119.63 R15.1
N$77
  Bottom 0.61: R16.1 16.76,119.13 17.53,118.36 28.96,118.36 31.5,115.82 SV6.1
N$78
  pour Bottom (isolate 1.524): 191.52,138.68 0,138.68 0,0 191.52,0
N$79  (via drill 1.52 pad 3.81)
  other vias: 178.05,112.78
N$80
  Bottom 0.813: SG1.+ 23.62,104.39 42.93,104.39 45.21,102.11 SV11.3
N$81
  pour Top (isolate 1.524): 0,0 0,138.68 191.52,138.68 191.52,0
N$83
  Bottom 0.813: SV11.1 Q1.E
N$84
  Bottom 0.813: SG1.- 23.88,97.03 Q1.C
N$85
  Bottom 0.813: Q1.B 36.83,101.09 35.81,102.11 R17.2
N$86
  Bottom 0.813: SV11.2 41.91,99.57 40.64,100.84 R17.1
N$87
  Bottom 0.813: R18.2 SV12.2
N$88
  Bottom 0.813: SV12.3 166.95,48.26 R18.1
N$89
  Bottom 0.813: SV12.1 166.95,43.18 R18.3
N$90
  Bottom 0.813: SV13.4 150.11,20.57 | 150.11,20.57 150.62,20.57 | 150.62,20.57 151.13,20.57 | 151.13,20.57 U$1.1 | R19.1 R20.2 150.62,21.08 | 150.62,20.57 150.62,21.08 | 150.62,21.08 150.11,20.57 | 150.62,21.08 151.13,20.57
N$91
  Bottom 0.813: U$1.2 153.92,18.03 | 153.16,18.03 152.4,18.03 | 152.4,18.03 SV13.3 | R19.2 153.16,17.53 | 153.16,18.03 153.16,17.53 | 153.16,18.03 153.92,18.03 | 153.16,17.53 153.42,17.53 153.92,18.03 | 153.16,17.53 152.91,17.53 152.4,18.03
N$92
  Top 0.813: U$1.3 160.78,15.49 159.26,17.02 149.86,17.02 148.34,15.49 SV13.2
N$93
  Bottom 0.813: SV14.3 171.7,28.96 170.69,29.97 164.85,29.97 163.83,28.96 SV15.1
N$94
  Bottom 0.813: SV13.1 149.1,12.95 151.13,10.92 LED9.K 156.72,10.92 158.75,12.95 U$1.4
N$95
  Top 0.813: R21.2 168.15,31.24 168.4,31.5 SV14.2
  Bottom 0.813: SV15.2 SV14.2
N$96
  Bottom 0.813: LED9.A 151.38,13.46 150.62,14.22 R20.1
N$97
  Bottom 0.813: SV14.1 168.91,34.04 | 168.91,34.04 168.15,34.04 | 168.15,34.04 167.39,34.04 | 167.39,34.04 SV15.3 | 168.15,34.04 R21.1 168.15,34.8 | 168.15,34.8 167.39,34.04 | 168.15,34.8 168.91,34.04
N$98
  Bottom 0.813: 9.91,26.92 9.91,18.29 10.92,17.28 DIS1.1 42.48,17.28 46.3,13.46 54.1,13.46 54.61,13.97 54.61,20.07 | 9.91,26.92 9.91,27.43 | 9.91,27.43 9.91,28.19 | 9.91,28.19 9.91,54.61 10.67,55.38 DIS1.16 | DIS1.5 10.66,27.44 | 10.66,27.44 9.91,27.44 9.91,27.43 | 9.91,28.19 10.66,27.44 | 10.66,27.44 10.15,26.92 9.91,26.92 | SV16.7 53.85,27.69 54.61,26.92 54.61,21.59 | 54.61,20.07 54.61,20.57 | 54.61,20.57 54.61,21.59 | R22.E 53.85,20.83 | 53.85,20.83 54.36,20.83 54.61,20.57 | 53.85,20.83 54.61,21.59 | 53.85,20.83 54.61,20.07
N$99
  Top 0.813: DIS1.2 10.66,19.82 9.91,20.57 9.91,52.07 10.67,52.84 DIS1.15
  Bottom 0.813: SV16.8 50.55,24.89 49.78,24.89 49.28,24.38 49.28,16.26 | DIS1.2 41.91,19.82 46.23,15.49 48.51,15.49 | 48.51,15.49 48.77,15.49 | 49.28,16.26 49.28,16 48.77,15.49 | 49.28,16.26 48.51,15.49 | 48.77,15.49 51.82,15.49 R22.A
N$100
  Bottom 0.813: R22.S 42.92,22.36 DIS1.3
N$101
  Bottom 0.813: SV16.1 32,42.93 24.63,50.3 DIS1.14
N$102
  Bottom 0.813: DIS1.13 22.86,47.76 30.23,40.39 SV16.2
N$103
  Bottom 0.813: SV16.3 28.96,37.85 21.59,45.22 DIS1.12
N$104
  Bottom 0.813: DIS1.11 20.32,42.68 27.69,35.31 SV16.4
N$105
  Bottom 0.813: DIS1.6 19.05,29.98 21.84,32.77 SV16.5
N$106
  Bottom 0.813: DIS1.4 19.82,24.9 25.15,30.23 SV16.6
N$107
  Top 0.508: SV17.1 80.01,10.92 74.17,16.76 R23.1
N$108
  Bottom 0.508: D3.8 66.55,26.16 | 66.55,26.16 D3.3 | R23.2 66.55,26.16
N$109
  Bottom 0.406: 75.69,29.97 71.88,29.97
  Bottom 0.508: SV17.9 81.03,31.24 79.76,29.97 75.69,29.97 | 71.88,29.97 68.33,29.97 67.06,28.7 D3.7
N$110
  Top 0.406: 75.69,27.43 72.14,27.43
  Top 0.508: SV17.8 79.5,28.7 78.23,27.43 75.69,27.43 | 72.14,27.43 70.61,27.43 66.8,31.24 D3.6
N$111
  Bottom 0.508: SV17.7 78.74,26.16 76.2,28.7 D3.4
N$112
  Top 0.508: D3.2 SV17.6
N$113
  Top 0.508: SV17.5 D3.1
N$114
  Bottom 0.508: D3.9 59.18,23.62 65.79,17.02 78.99,17.02 80.52,18.54 SV17.4
N$115
  Bottom 0.508: D3.10 59.69,21.08 64.77,16 SV17.3
N$116
  Top 0.406: 79.76,29.97 82.8,29.97
  Top 0.508: D3.5 75.69,31.24 76.96,29.97 79.76,29.97 | 82.8,29.97 83.31,29.46 83.31,14.22 82.55,13.46 SV17.2
N$117
  Top 0.406: 72.39,32.77 75.44,32.77
  Top 0.508: R24.1 66.8,33.27 67.31,32.77 72.39,32.77 | 75.44,32.77 78.99,32.77 80.26,34.04 SV18.1
N$118
  Bottom 0.508: D4.3 72.14,39.12 | 72.14,39.12 71.63,39.12 | 71.63,39.12 71.12,39.12 | 71.12,39.12 D4.8 | R24.2 72.64,46.74 71.63,45.72 71.63,39.62 | 71.63,39.62 71.63,39.12 | 71.63,39.62 71.12,39.12 | 71.63,39.62 72.14,39.12
N$119
  Bottom 0.406: 82.8,50.55 79.76,50.55
  Bottom 0.508: SV18.9 82.8,54.36 83.82,53.34 83.82,51.31 83.06,50.55 82.8,50.55 | 79.76,50.55 74.68,50.55 65.79,41.66 D4.7
N$120
  Bottom 0.508: SV18.8 74.17,51.82 66.55,44.2 D4.6
N$121
  Bottom 0.508: SV18.7 80.01,49.28 77.72,46.99 77.72,43.43 75.95,41.66 D4.4
N$122
  Top 0.508: SV18.6 80.26,46.74 77.98,44.45 77.98,37.34 77.22,36.58 D4.2
N$123
  Top 0.508: SV18.5 79.76,44.2 78.99,43.43 78.99,35.05 77.98,34.04 D4.1
N$124
  Bottom 0.406: 75.44,37.85 72.39,37.85
  Bottom 0.508: SV18.4 80.01,41.66 76.2,37.85 75.44,37.85 | 72.39,37.85 71.63,37.85 70.36,36.58 D4.9
N$125
  Bottom 0.406: 75.44,35.31 72.64,35.31
  Bottom 0.508: SV18.3 80.01,39.12 76.2,35.31 75.44,35.31 | 72.64,35.31 72.39,35.31 71.12,34.04 D4.10
N$126
  Top 0.406: 79.76,48.01 82.8,48.01
  Top 0.508: 82.8,48.01 83.31,47.5 83.31,36.83 83.06,36.58 SV18.2 | 79.76,48.01 75.95,44.2 D4.5
N$127  (via drill 0.76 pad 1.78)
  Top 0.813: v151.13,73.41 v157.48,73.41
  Bottom 0.813: U$3.OUT+ 30.61,68.45 29.46,69.6 29.46,72.39 30.99,73.91 36.83,73.91 54.86,91.95 79.5,91.95 83.82,87.63 83.82,81.28 89.15,75.95 148.59,75.95 v151.13,73.41 | v157.48,73.41 157.99,73.91 S2.2
N$128  (via drill 0.76 pad 1.78)
  Top 0.813: v161.29,76.2 v151.13,76.2
  Bottom 0.813: S2.5 157.99,117.09 158.5,117.6 161.54,117.6 162.56,116.59 162.56,109.22 161.29,107.95 v161.29,76.2 | v151.13,76.2 149.86,77.47 89.92,77.47 85.09,82.3 85.09,89.92 81.53,93.47 54.1,93.47 36.07,75.44 25.53,75.44 22.99,72.9 U$3.OUT-
N$131
  Bottom 0.813: R25.1 LED10.A
N$132
  Bottom 0.813: U$2.6 SV21.1
N$133
  Bottom 0.813: SV21.2 U$2.5
N$134  (via drill 0.76 pad 1.78)
  Top 0.813: v151.13,70.87 v157.48,70.87
  Bottom 0.813: D6.C 34.8,71.37 | 35.81,70.36 34.8,71.37 | 35.81,70.36 35.81,70.61 36.58,71.37 | 35.81,70.36 K3.1 | v151.13,70.87 149.35,70.87 145.8,74.42 87.63,74.42 82.55,79.5 82.55,86.61 78.74,90.42 55.63,90.42 36.58,71.37 | S4.2 173.23,107.95 172.21,106.93 165.1,106.93 163.07,104.9 163.07,73.15 160.78,70.87 v157.48,70.87 | 34.8,71.37 36.58,71.37
N$135
  Bottom 1.016: J1.1 166.32,125.53 163.83,128.02 151.38,128.02 150.88,127.51 D5.A
N$136  (via drill 0.76 pad 1.78)
  Top 0.813: v17.27,65.79 39.62,65.79 40.89,64.52 K3.10
  Bottom 0.813: J1.2 167.11,130.05 57.91,130.05 55.88,128.02 55.88,101.35 47.75,93.22 21.84,93.22 17.27,88.65 v17.27,65.79
  Bottom 1.016: J1.3 172.42,126.54 171.22,127.74 J1.2
N$137
  Bottom 0.813: D5.C 140.72,128.27 140.46,128.52 58.67,128.52 57.4,127.25 57.4,100.33 48.77,91.69 23.37,91.69 19.3,87.63 19.3,64.01 20.32,62.99 35.56,62.99 K3.3
N$138
  Top 0.813: X3.3 162.81,120.65 163.58,121.41 163.58,128.52 162.05,130.05 56.39,130.05 55.12,128.78 55.12,100.33 48.01,93.22 18.8,93.22 14.99,89.41 14.99,61.98 18.8,58.17 K3.5
N$139
  Top 0.813: X3.2 158.75,123.19 158.24,123.7 158.24,128.02 157.99,128.27 58.17,128.27 56.9,127 56.9,99.06 46.48,88.65 46.48,72.14 45.72,71.37 D6.A
  Bottom 0.813: D6.A 41.66,71.37 40.89,70.61 K3.12 39.62,68.33 39.12,67.82 39.12,58.67 39.62,58.17 K3.8
N$140
  Bottom 0.813: X3.1 162.56,125.73 163.58,124.71 163.58,118.62 164.59,117.6 176.78,117.6 177.93,116.46 S4.3
N$141  (via drill 1.27 pad 3.3)
  other vias: 166.37,122.94
N$142  (via drill 1.27 pad 3.3)
  other vias: 172.47,122.94
N$143  (via drill 1.27 pad 3.3)
  other vias: 169.42,127.76
N$144  (via drill 1.52 pad 3.81)
  other vias: 173.23,112.78
N$145  (via drill 1.52 pad 3.81)
  other vias: 168.4,112.78
N$146  (via drill 0.76 pad 1.78)
  Top 0.813: K3.9 45.21,60.71 48.01,63.5 48.01,86.87 v59.44,98.3
  Bottom 0.813: U$3.IN- 26.03,52.96 28.7,50.29 42.16,50.29 43.43,51.56 43.43,59.44 42.16,60.71 K3.9 | SV19.6 132.08,120.4 125.48,127 82.55,127 80.77,125.22 80.77,100.08 78.99,98.3 v59.44,98.3
  Bottom 1.27: SV19.6 SV19.5 SV19.4 SV19.3 SV19.2 SV19.1
N$147
  Top 0.813: SV20.6 147.32,121.92 146.05,123.19 129.29,123.19 125.73,126.75 84.33,126.75 81.28,123.7 81.28,99.57 78.99,97.28 61.98,97.28 49.78,85.09 49.78,57.4 48.26,55.88 38.86,55.88 38.1,56.64 38.1,59.94 37.34,60.71 K3.4
  Bottom 0.813: K3.4 33.02,60.71 32.38,60.07 U$3.IN+
  Bottom 1.27: SV20.6 SV20.5 SV20.4 SV20.3 SV20.2 SV20.1
N$148
  Bottom 0.813: U$2.4 SV21.3
N$149
  Bottom 0.813: SV21.4 U$2.3
N$150
  Bottom 0.813: U$2.2 SV21.5
N$151
  Bottom 0.813: SV21.6 U$2.1

## Text on the board
Top: HERLIN SETYAWAN (082281374512)
tPlace: LIGHT EMITTING DIODE / (LED)
tNames: L1 | L2 | L3 | L4 | L5 | L6 | NC | COM | NO | NC | COM | NO | BLUETOOTH / HC-05 | MOTOR 2 | MOTOR 4 | IN 12V | M | M | L1 | L2 | L3 | L4 | L5 | L6 | GN | P.SUPPLY | BATTERAI | 5V | MOTOR 1 | MOTOR 3 | GN | S1 | GND | 12V | BUZZER | IN | 5V | GN | S1 | M | M | PUSH BUTTON | S2 | S2 | GND | S3 | S4 | ECHO | ULTRASONIC 3 | S5 | TRIG | S3 | S6 | 5V | M2 | M1 | MODUL RELAY / 2 CHANEL | R1 | R2 | G | 5V | ST | RX | TX | GN | 5V | EN | S4 | DRIVER MOTOR DC | S5 | LIQUID CRYSTAL DISPLAY / (LCD 16X2) | GND | TX | VIN | RX | GN | ECHO | ULTRASONIC 2 | TRIG | RT | RT | S6 | IN1 | IN2 | EN1 | IN3 | IN4 | EN2 | 12V | 5V | GND | 5V | GN | 5V | A | D2 | A7 | B | D3 | A6 | C | D4 | A5 | D | D5 | A4 | 5V | POTENSIO | E | D6 | A3 | OUT | D7 | F | D7 | A2 | GN | D6 | GND | G | D8 | A1 | D5 | ECHO | P | D9 | A0 | ULTRASONIC 1 | D4 | TRIG | GN | D10 | REF | E | 5V | 5V | SEVEN SEGMENT | A | D11 | 3V3 | RS | OUT | SEN. SUHU / DS18B20 | D12 | D13 | B | GN | GN | C | 5V | HS AUTOMATION AND EDUCATION | D | 5V | GND | GND | 5V | E | 5V | F | ARDUINO BASIC AND MOBILE ROBOTIC / ARDUINO NANO | G | DAT | DHT 11 | BC | P | TRAINING KIT | GN | GN